# Altium PCB PCB.PcbDoc
Units mm, origin at the board's own origin, x right, y up, seen from the top; angles counter-clockwise.
Board outline 100 x 90 mm, 2 copper layers (Top Layer, Bottom Layer); 31 components, 42 nets, 141 pads, 8 vias.
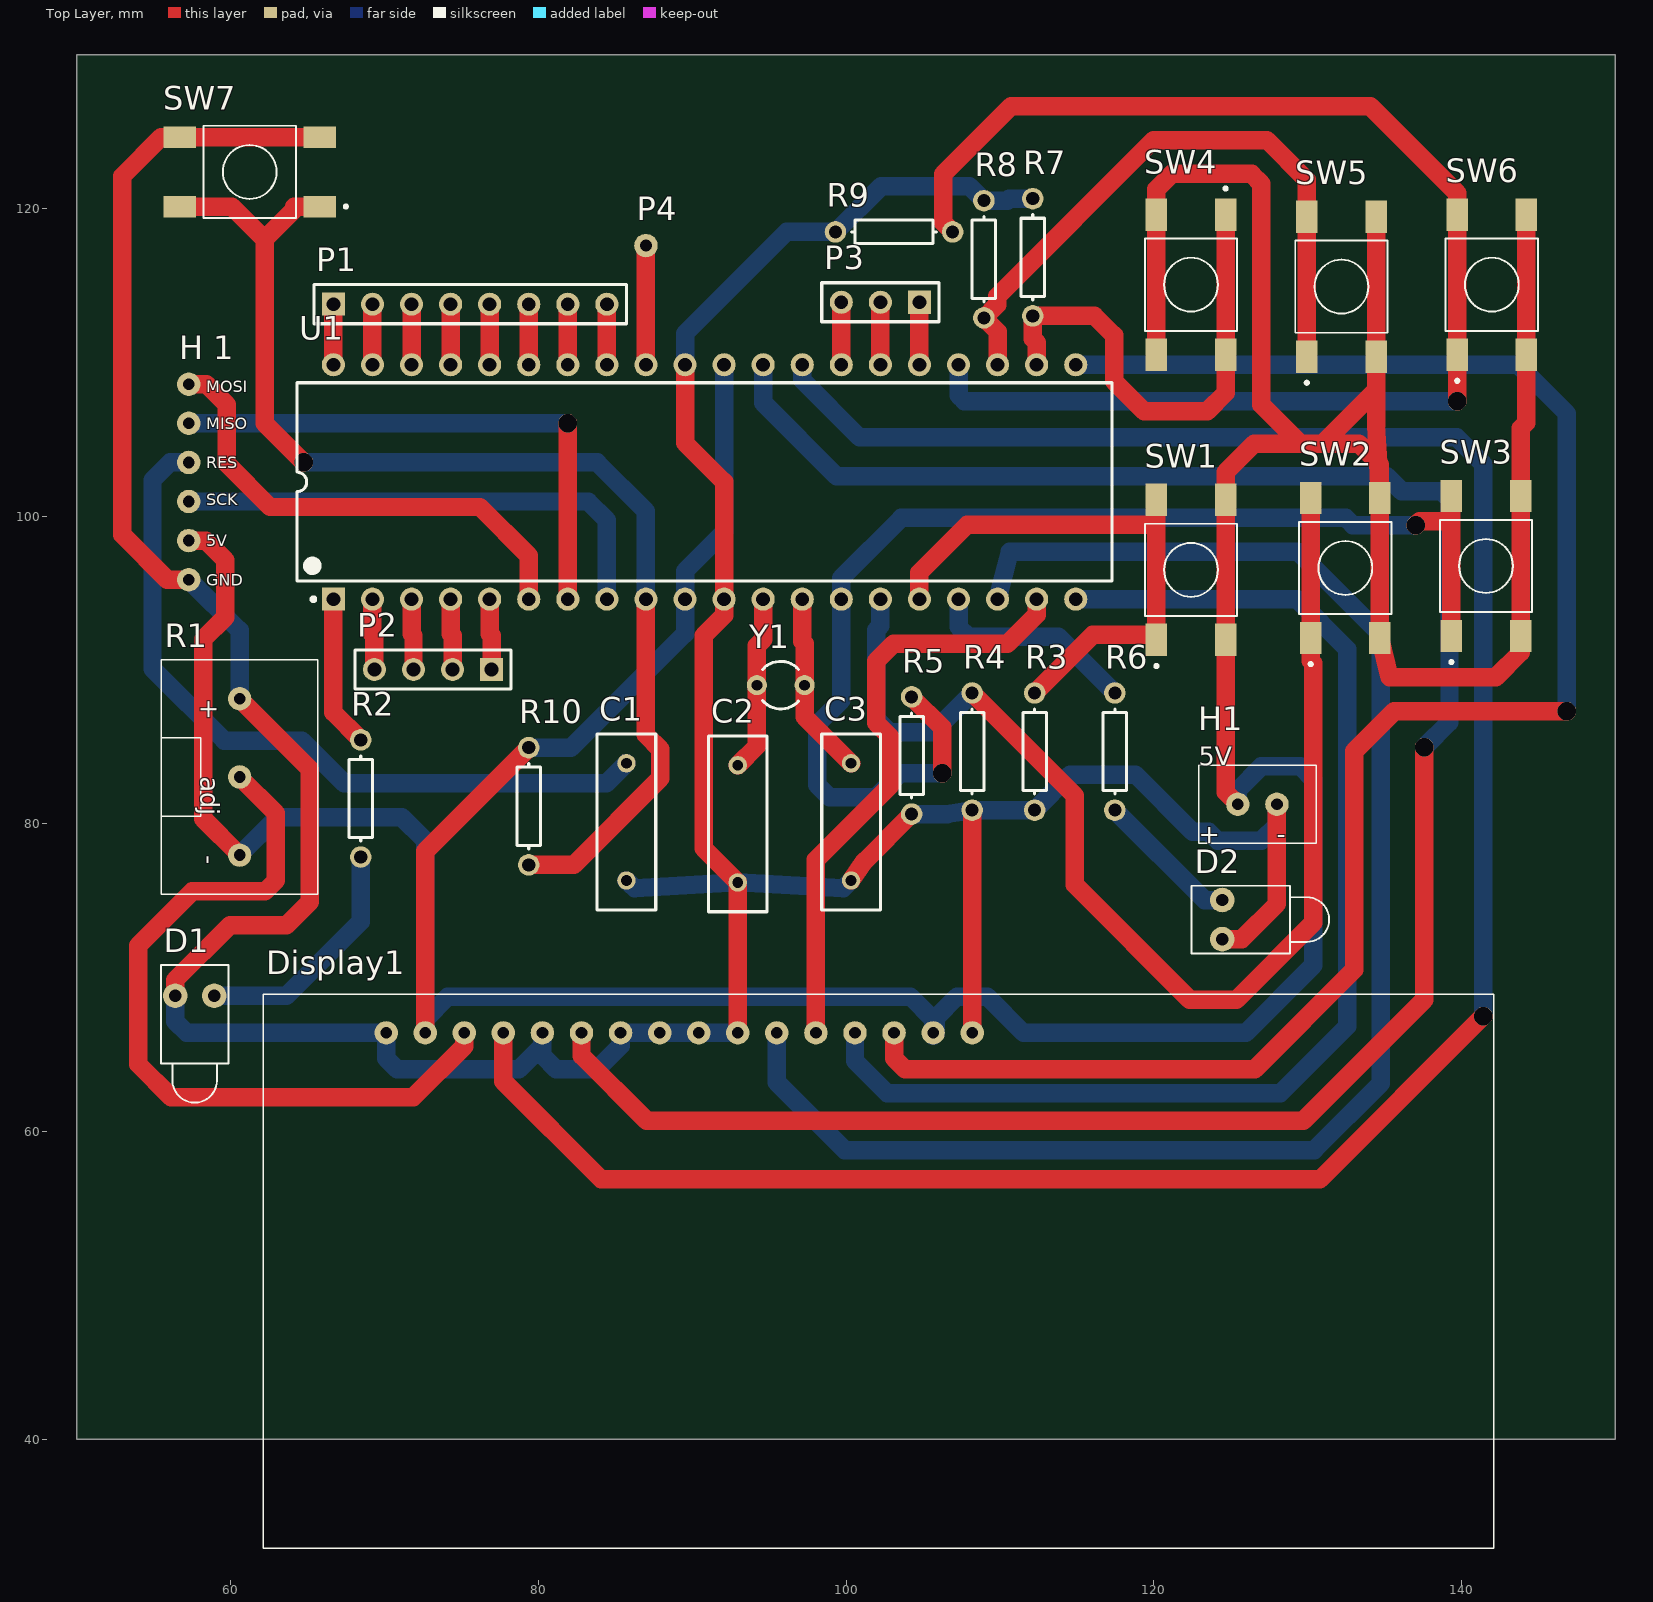
[diagram p0: Top Layer view]
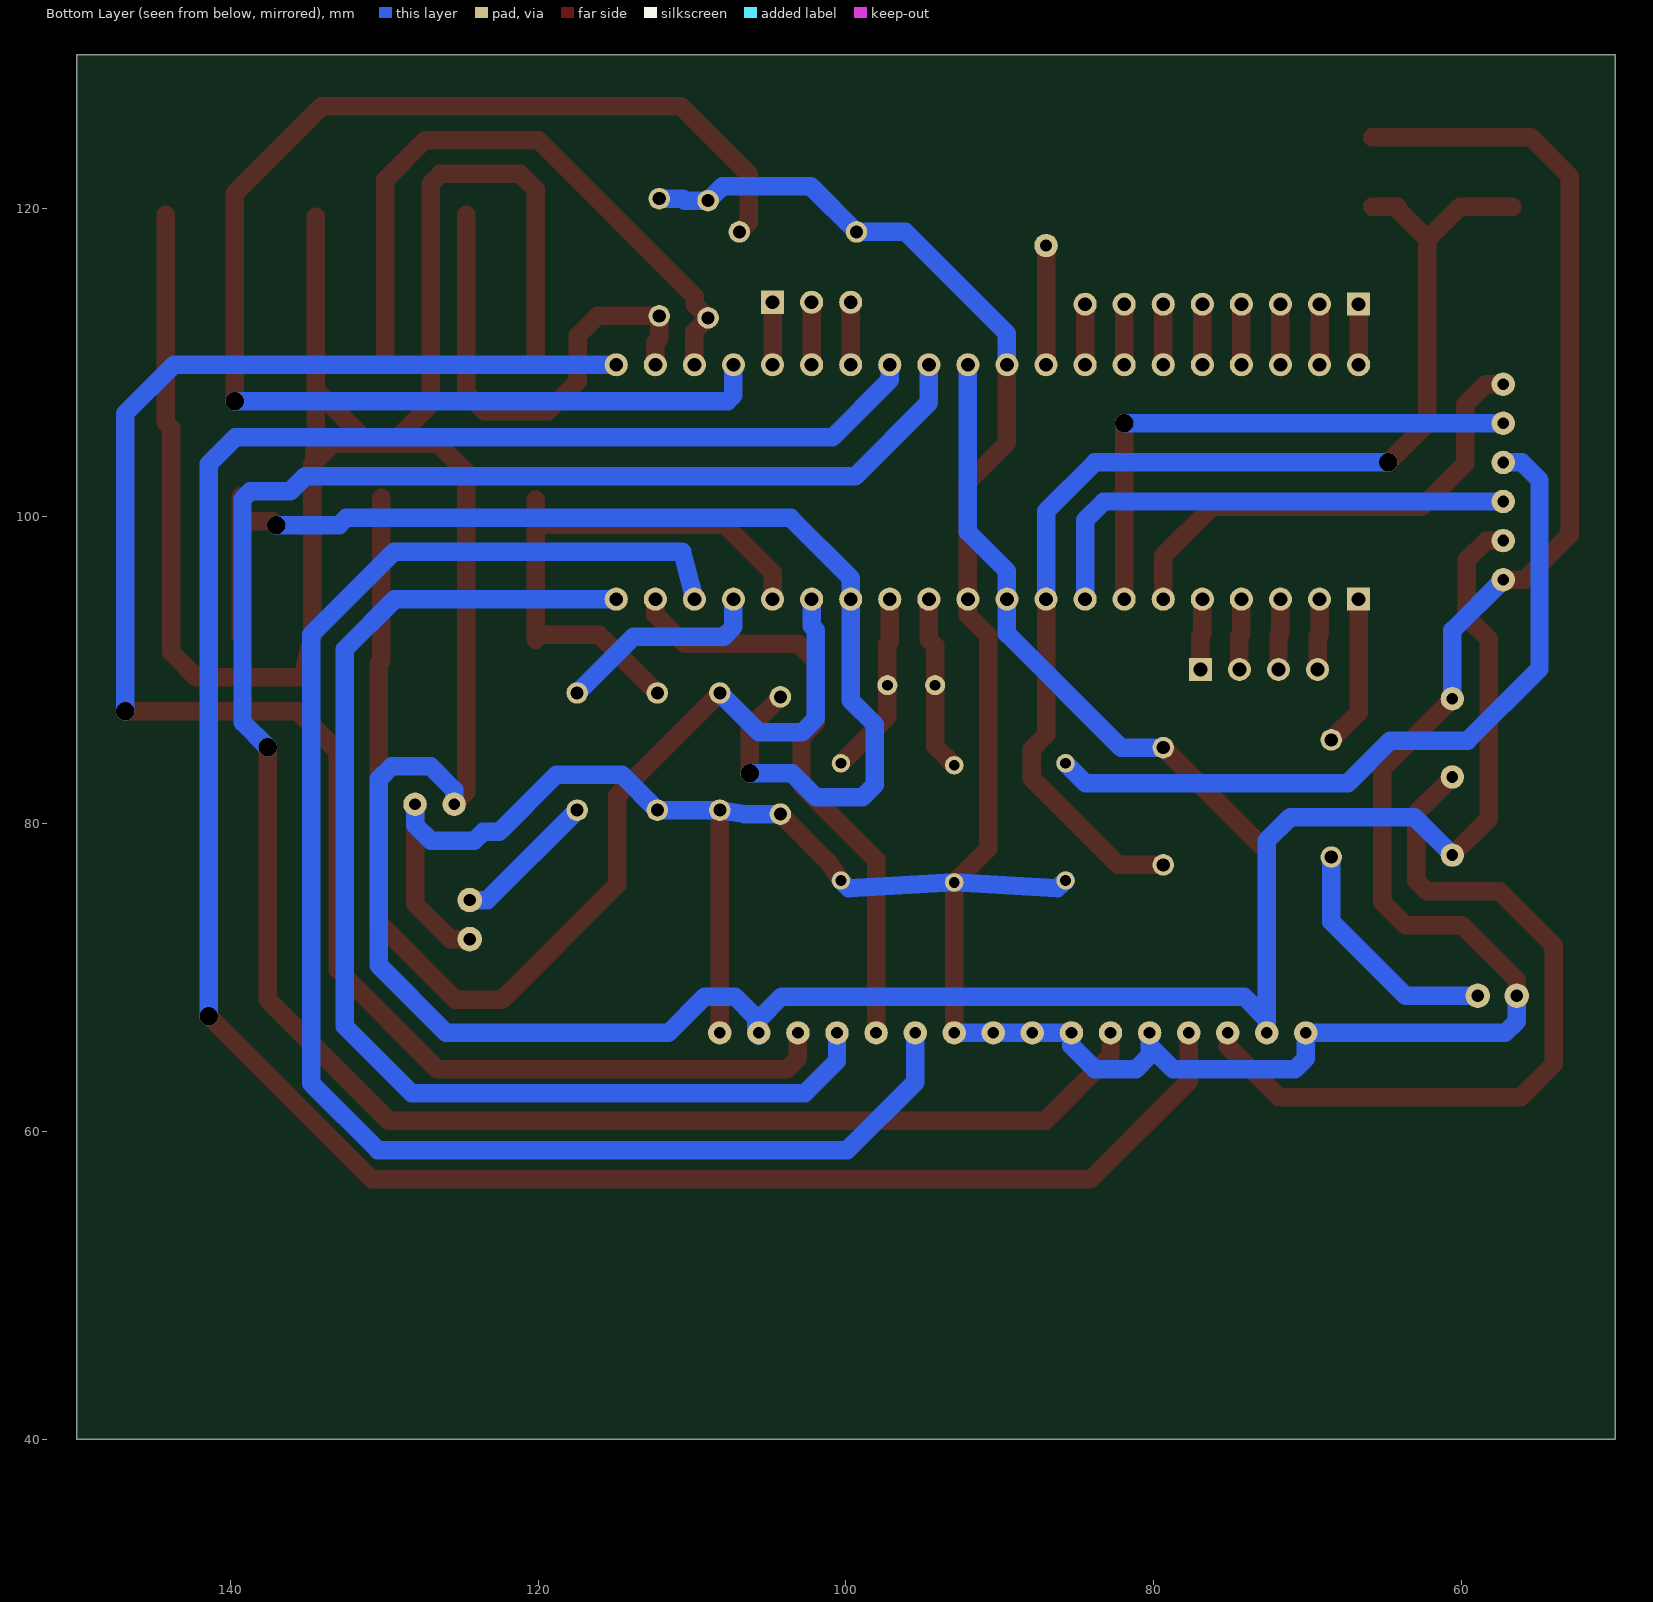
[diagram p1: Bottom Layer view, seen from below]

## Layer stack, top to bottom
Top Solder: solder mask 0.0102, Solder Resist, Dk 3.5
Top Layer: signal copper 0.0356
Dielectric 1: dielectric 0.32, FR-4, Dk 4.8
Bottom Layer: signal copper 0.0356
Bottom Solder: solder mask 0.0102, Solder Resist, Dk 3.5

## Board outline
50,130 150,130 150,40 50,40

## Design rules (kind name [scope] priority, off if disabled: settings)
Clearance [All] p1: gap=0.6 ignorepadtopadclearanceinfootprint=FALSE
PolygonConnect [All] p1: connectstyle=Relief reliefconductorwidth=0.254 reliefentries=4 polygonreliefangle="90 Angle" airgapwidth=0.254
RoutingVias [All] p1: holewidth=1.2 width=1.2 viastyle="Through Hole" minholewidth=1.2 minwidth=1.2 maxholewidth=1.2 maxwidth=1.2
SilkToSilkClearance [All] p1 off: silktosilkclearance=0.254
SilkToSolderMaskClearance [IsPad] p1 off: minsilkscreentomaskgap=0.254 clearancetoexposedcopper=TRUE
SolderMaskExpansion [All] p1: expansion=0.102
Width [All] p1: maxlimit=1.5 minlimit=1 preferedwidth=1.2
28 further rules are at their usual default settings.

## Components (designator, comment, footprint, x,y, rotation, side; value= is the part's Value field where it differs from the comment)
C1 "Cap" RAD-0.3 85.725,80.137 r270 top value=10uF
C2 "Cap" RAD-0.3 92.964,80.01 r90 top value=22pF
C3 "Cap" RAD-0.3 100.33,80.137 r90 top value=22pF
D1 "LED1" LED-1 57.658,68.834 r270 top
D2 "LED1" LED-1 124.46,73.787 r0 top
Display1 "LCD 16 x 2" LCD16x2 62.104,68.921 r0 top
H1 "Prikljucak 5V" "H 5V" 125.476,81.28 r0 top
"H 1" "Programator" USBASP 57.277,108.585 r270 top
P1 "Header 8" HDR1X8 66.675,113.792 r0 top
P2 "Header 4" HDR1X4 76.962,90.043 r180 top
P3 "Header 3" HDR1X3 104.775,113.919 r180 top
P4 "Header 1" "Header 1" 86.995,117.602 r0 top
R1 "10k" ADJ_RES 60.579,83.058 r270 top
R2 "Res1" AXIAL-0.3 68.453,81.661 r90 top value=470
R3 "Res1" AXIAL-0.3 112.268,84.709 r90 top value=10K
R4 "Res1" AXIAL-0.3 108.204,84.709 r90 top value=10K
R5 "Res1" AXIAL-0.3 104.267,84.455 r90 top value=10K
R6 "Res1" AXIAL-0.3 117.475,84.709 r270 top value=470
R7 "Res1" AXIAL-0.3 112.141,116.84 r270 top value=10K
R8 "Res1" AXIAL-0.3 108.966,116.713 r270 top value=10K
R9 "Res1" AXIAL-0.3 103.124,118.491 r0 top value=10K
R10 "Res1" AXIAL-0.3 79.375,81.153 r270 top value=10K
SW1 "2-1437565-8" *SW_SMD_2-1437565-8_4_4.50_6.00_6.00_5.00 122.428,96.52 r90 top
SW2 "2-1437565-8" *SW_SMD_2-1437565-8_4_4.50_6.00_6.00_5.00 132.461,96.647 r90 top
SW3 "2-1437565-8" *SW_SMD_2-1437565-8_4_4.50_6.00_6.00_5.00 141.605,96.774 r90 top
SW4 "2-1437565-8" *SW_SMD_2-1437565-8_4_4.50_6.00_6.00_5.00 122.428,115.062 r270 top
SW5 "2-1437565-8" *SW_SMD_2-1437565-8_4_4.50_6.00_6.00_5.00 132.207,114.935 r90 top
SW6 "2-1437565-8" *SW_SMD_2-1437565-8_4_4.50_6.00_6.00_5.00 141.986,115.062 r90 top
SW7 "2-1437565-8" *SW_SMD_2-1437565-8_4_4.50_6.00_6.00_5.00 61.236,122.392 r180 top
U1 "ATmega32-16PI" 40P6 90.805,102.235 r90 top
Y1 "XTAL" R38 95.758,89.027 r270 top

## Footprints (in the part's own frame and the unit in brackets; to place one, negate y for a bottom-side part, rotate by r counter-clockwise, add the part's x,y. Pads: shape width x height; smd on the part's side, far side on the other; paste and mask are expansions set on the pad)
40P6 [mm] "DIP, 40-Leads, Row Spacing 15.24mm, Pitch 2.54mm, Body 52.2x13.95mm"
  rect 1.5x1.5 hole 0.9: 1(-7.62,24.13)
  round 1.5 hole 0.9: 2(-7.62,21.59) 3(-7.62,19.05) 4(-7.62,16.51) 5(-7.62,13.97) 6(-7.62,11.43) 7(-7.62,8.89) 8(-7.62,6.35) 9(-7.62,3.81) 10(-7.62,1.27) 11(-7.62,-1.27) 12(-7.62,-3.81) 13(-7.62,-6.35) 14(-7.62,-8.89) 15(-7.62,-11.43) 16(-7.62,-13.97) 17(-7.62,-16.51) 18(-7.62,-19.05) 19(-7.62,-21.59) 20(-7.62,-24.13) 21(7.62,-24.13) 22(7.62,-21.59) 23(7.62,-19.05) 24(7.62,-16.51) 25(7.62,-13.97) 26(7.62,-11.43) 27(7.62,-8.89) 28(7.62,-6.35) 29(7.62,-3.81) 30(7.62,-1.27) 31(7.62,1.27) 32(7.62,3.81) 33(7.62,6.35) 34(7.62,8.89) 35(7.62,11.43) 36(7.62,13.97) 37(7.62,16.51) 38(7.62,19.05) 39(7.62,21.59) 40(7.62,24.13)
  silkscreen extent -7.74,-26.5 6.45,26.5, body extent -7.05,-26.47 7.05,26.47, height 4.83
*SW_SMD_2-1437565-8_4_4.50_6.00_6.00_5.00 [mm]
  rect 2.1x1.4 smd: 1(-4.55,2.25) 2(4.55,2.25) 3(-4.55,-2.25) 4(4.55,-2.25)
  silkscreen extent -6.35,-3 3,3
ADJ_RES [mil] "Promenljivi Otpornik"
  round 60 hole 30: 1(-200,0) 2(200,0) 3(0,0)
  silkscreen extent -300,-200 300,200
AXIAL-0.3 [mm] "Axial Device, Thru-Hole; 2 Leads; 0.3 in Pin Spacing"
  round 1.4 hole 0.85: 1(-3.81,0) 2(3.81,0)
  silkscreen extent -2.77,-0.76 2.77,0.76
"H 5V" [mil] "prikljucak 5 volti"
  round 60 hole 30: 1(0,0) 2(100,0)
  silkscreen extent -100,-100 200,100
HDR1X3 [mm] "Connector; Header; 3 Position"
  rect 1.5x1.5 hole 0.9: 1(0,0)
  round 1.5 hole 0.9: 2(2.54,0) 3(5.08,0)
  silkscreen extent -1.27,-1.27 6.35,1.27
HDR1X4 [mm] "Connector; Header; 4 Position"
  rect 1.5x1.5 hole 0.9: 1(0,0)
  round 1.5 hole 0.9: 2(2.54,0) 3(5.08,0) 4(7.62,0)
  silkscreen extent -1.27,-1.27 8.89,1.27
HDR1X8 [mm] "Connector; Header; 8 Position"
  rect 1.5x1.5 hole 0.9: 1(0,0)
  round 1.5 hole 0.9: 2(2.54,0) 3(5.08,0) 4(7.62,0) 5(10.16,0) 6(12.7,0) 7(15.24,0) 8(17.78,0)
  silkscreen extent -1.27,-1.27 19.05,1.27
"Header 1" [mil]
  round 60 hole 30: 1(0,0)
LCD16x2 [mil] "LCD16x2"
  round 60 hole 30: 1(314.96,-98.43) 2(414.96,-98.43) 3(514.96,-98.43) 4(614.96,-98.43) 5(714.96,-98.43) 6(814.96,-98.43) 7(914.96,-98.43) 8(1014.96,-98.43) 9(1114.96,-98.43) 10(1214.96,-98.43) 11(1314.96,-98.43) 12(1414.96,-98.43) 13(1514.96,-98.43) 14(1614.96,-98.43) 15(1714.96,-98.43) 16(1814.96,-98.43)
  silkscreen extent 0,-1417 3150,0
LED-1 [mm] "LED; 2 Leads"
  round 1.6 hole 0.8: 1(0,1.27) 2(0,-1.27)
  silkscreen extent -2,-2.2 6.95,2.2
R38 [mm] "Crystal, Thru-Hole; 2 Leads; Body 3.1 x 8.2 mm (Dia.xH)"
  round 1.3 hole 0.7: 1(0,1.55) 2(0,-1.55)
  silkscreen extent -1.55,-1.19 1.55,1.17
RAD-0.3 [mm] "Radial Cap, Thru-Hole; 2 Leads; 0.3 in Pin Spacing"
  round 1.2 hole 0.7: 1(-3.81,0) 2(3.81,0)
  silkscreen extent -5.71,-1.91 5.71,1.91
USBASP [mil]
  round 60 hole 30: 1(0,0) 2(100,0) 3(200,0) 4(300,0) 5(400,0) 6(500,0)

## Part data
C1 C2 C3: "Capacitor", LatestRevisionDate=17-Jul-2002, LatestRevisionNote="Re-released for DXP Platform.", PackageDescription="Radial Cap, Thru-Hole; 2 Leads; 0.3 in Pin Spacing", PackageReference=RAD-0.3, Published=8-Jun-2000, Publisher="Altium Limited"
D1 D2: "Typical RED GaAs LED", LatestRevisionDate=08-Jul-2005, LatestRevisionNote="Mech Layer 1 removed.", PackageDescription="LED; 2 Leads", PackageReference=LED-1, Published=8-Jun-2000, Publisher="Altium Limited"
Display1: library part "LCD 16 X 2"
H1: library part "Header 5V"
"H 1": library part USBASP
P1: "Header, 8-Pin", LatestRevisionDate=17-Jul-2002, LatestRevisionNote="Re-released for DXP Platform.", Publisher="Altium Limited"
P2: "Header, 4-Pin", LatestRevisionDate=17-Jul-2002, LatestRevisionNote="Re-released for DXP Platform.", Publisher="Altium Limited"
P3: "Header, 3-Pin", LatestRevisionDate=17-Jul-2002, LatestRevisionNote="Re-released for DXP Platform.", Publisher="Altium Limited"
R1: library part ADJ_RES
R2 R3 R4 R5 R6 R7 R8 R9 R10: "Resistor", LatestRevisionDate=17-Jul-2002, LatestRevisionNote="Re-released for DXP Platform.", PackageDescription="Axial Device, Thru-Hole; 2 Leads; 0.3 in Pin Spacing", PackageReference=AXIAL-0.3, Published=8-Jun-2000, Publisher="Altium Limited"
SW1 SW2 SW3 SW4 SW5 SW6 SW7: "Tactile Switch SPST-NO Top Actuated Surface Mount", Contact_Current_Rating="50 mA", Package=None, Availability=Unavailable, Configuration_Pole-Throw="Single Pole - Single Throw", MF="TE Connectivity", MP=2-1437565-8, Price=None, SnapEDA_Link=https://www.snapeda.com/parts/2-1437565-8/TE%20Connectivity%20ALCOSWITCH%20Switches/view-part/455292/?ref=snap, TE_purchase_URL=https://www.te.com/usa-en/product-2-1437565-8.html?te_bu=Cor&te_type=disp&te_campaign=seda_glo_cor-seda-global-disp-prtnr-fy19-seda-model-bom-cta_sma-317_1&elqCampaignId=32493
U1: "8-Bit AVR Microcontroller with 32K Bytes of In-System Programmable Flash Memory", Supplier Part Number 1=ATMEGA32-16PI-ND, Code_JEDEC=MS-011-AC, ComponentLink1Description=Datasheet, ComponentLink1URL=http://www.atmel.com/dyn/resources/prod_documents/doc2503.pdf, ComponentLink2Description="Atmel.com Home", ComponentLink2URL=http://www.atmel.com, DatasheetVersion=2503C-AVR-10/02, PackageDescription="40-lead (0.600\"/15.24mm Wide) Plastic Dual Inline Package (PDIP)", PackageReference=40P6, PackageVersion="revB, Sep-2001", Published=17-Sep-2003, Publisher="Altium Limited", Supplier 1=Digi-Key, Supplier 2=Farnell, Supplier 3=Mouser, Supplier Part Number 2=4376328, Supplier Part Number 3=556-ATMEGA32-16PI
Y1: "Crystal Oscillator", LatestRevisionDate=17-Jul-2002, LatestRevisionNote="Re-released for DXP Platform.", PackageDescription="Crystal, Thru-Hole; 2 Leads; Body 3.1 x 8.2 mm (Dia.xH)", PackageReference=R38, Published=8-Jun-2000, Publisher="Altium Limited"

## Via types
v1: diameter 1.2, hole 1.2, Top Layer to Bottom Layer, 8 vias

## Nets (pads, with @x,y where several pads share a name; then routed paths per layer and width w, separated by ;. In a path a pad name is that pad's centre, name@x,y a point inside that pad or via, vN(x,y) a via of type N, cw(c..) or ccw(c..) an arc to the next point about the centre after c; other vN are vias at no path point)
+5V: "H 1.5" Display1.2 Display1.15 H1.1 R1.2 R10.1 SW1.3 SW1.4 SW2.3 SW2.4 SW3.3 SW3.4 SW4.3 SW4.4 SW5.3 SW5.4 SW6.3 SW6.4 U1.10 U1.30 | length 330.7
  Top Layer w1.2: 57.277,98.425 58.369,98.425 59.639,97.155 59.639,93.447 58.217,92.024 58.217,80.34 R1.2 ; Display1.2 72.644,78.232 R10.1 ; SW4.4 SW4.3 120.178,121.26 121.18,122.262 126.365,122.262 127,121.627 127,107.264 129.54,104.724 ; H1.1 124.678,82.078 SW1.3 SW1.4 124.678,102.87 126.532,104.724 129.54,104.724 ; SW5.4 SW5.3 134.457,108.204 ; SW6.4 SW6.3 144.236,106.096 143.855,105.715 SW3.4 SW3.3 143.855,91.15 142.24,89.535 135.346,89.535 SW2.3 SW2.4 ; 129.54,104.724 130.977,104.724 ; 130.977,104.724 133.35,104.724 134.588,103.486 ; 130.977,104.724 134.457,108.204 ; 134.457,108.204 134.457,105.918 134.588,103.486 ; 134.588,103.486 SW2.4 ; 134.588,103.486 134.711,103.363 SW2.4
  Bottom Layer w1.2: R1.2 63.043,80.442 71.12,80.442 72.644,78.918 72.644,67.31 ; Display1.2 72.644,67.31 ; R10.1 82.118,84.963 89.535,92.38 U1.10 89.535,96.444 92.075,98.984 U1.30 ; H1.1 125.476,82.22 127,83.744 129.54,83.744 130.378,82.906 130.378,70.815 125.984,66.421 111.544,66.421 109.182,68.783 107.226,68.783 105.842,67.399 105.842,66.421 105.664,66.243 Display1.15 105.664,67.31 104.191,68.783 74.117,68.783 72.644,67.31
GND: "H 1.6" C1.2 C2.1 C3.1 D1.2 D2.2 Display1.1 Display1.5 Display1.7 Display1.8 Display1.9 Display1.10 Display1.16 H1.2 R1.1 R3.1 R4.1 R5.1 R7.1 R8.1 R9.1 SW7.3 SW7.4 U1.11 U1.31 | length 272.8
  Top Layer w1.2: D1.2 56.388,69.85 59.954,73.416 63.627,73.416 65.141,74.93 65.141,83.576 R1.1 ; 57.277,95.885 55.88,95.885 52.959,98.806 52.959,122.123 55.478,124.642 SW7.4 SW7.3 ; U1.31 89.535,104.775 92.075,102.235 U1.11 92.075,93.574 90.754,92.253 90.754,78.41 C2.1 Display1.10 ; C3.1 101.194,77.572 R5.1 ; Display1.16 R4.1 ; D2.2 125.73,72.517 128.016,74.803 H1.2
  Bottom Layer w1.2: D1.2 56.388,67.183 57.15,66.421 Display1.1 70.104,64.77 70.815,64.059 78.74,64.059 80.264,65.583 ; 57.277,95.885 60.579,92.583 R1.1 ; Display1.5 80.264,65.583 ; C1.2 86.274,75.835 C2.1 99.835,75.832 C3.1 ; U1.31 89.535,111.887 96.139,118.491 R9.1 102.286,121.463 108.026,121.463 R8.1 110.49,120.523 110.617,120.65 R7.1 ; Display1.10 Display1.9 Display1.8 Display1.7 85.344,65.583 83.82,64.059 81.153,64.059 80.264,64.948 80.264,65.583 ; R5.1 106.578,80.645 R4.1 R3.1 114.579,83.21 118.821,83.21 122.53,79.502 123.571,79.502 124.155,78.918 127,78.918 128.016,79.934 H1.2
NetC1_1: "H 1.3" C1.1 | length 49.5
  Bottom Layer w1.2: 57.277,103.505 56.058,103.505 54.915,102.362 54.915,90.094 59.588,85.42 64.618,85.42 67.386,82.652 84.43,82.652 C1.1
NetC2_2: C2.2 U1.12 Y1.2 | length 11.5
  Top Layer w1.2: C2.2 94.208,85.064 Y1.2 94.208,91.592 94.615,91.999 U1.12
NetC3_2: C3.2 U1.13 Y1.1 | length 12
  Top Layer w1.2: U1.13 97.155,91.872 97.308,91.719 Y1.1 97.308,86.969 C3.2
NetD1_1: D1.1 R2.1 | length 15.7
  Bottom Layer w1.2: D1.1 63.627,68.834 68.453,73.66 R2.1
NetD2_1: D2.1 R6.2 | length 9.4
  Bottom Layer w1.2: R6.2 123.317,75.057 D2.1
NetDisplay1_3: Display1.3 R1.3 | length 50.5
  Top Layer w1.2: R1.3 62.941,80.696 62.941,76.327 62.23,75.616 57.506,75.616 53.975,72.085 53.975,64.389 56.134,62.23 71.857,62.23 75.184,65.557 Display1.3
NetDisplay1_4: Display1.4 U1.28 | length 157.3
  Top Layer w1.2: Display1.4 77.724,63.271 84.099,56.896 130.813,56.896 v1(141.433,67.516)
  Bottom Layer w1.2: U1.28 97.155,108.864 100.886,105.134 139.7,105.134 141.433,103.4 v1(141.433,67.516)
NetDisplay1_6: Display1.6 U1.29 | length 144.2
  Top Layer w1.2: Display1.6 82.804,64.948 87.046,60.706 129.729,60.706 137.592,68.568 v1(137.592,84.988)
  Bottom Layer w1.2: U1.29 94.615,107.387 99.39,102.612 135.15,102.612 136.133,101.63 138.721,101.63 139.233,101.117 139.233,86.63 v1(137.592,84.988)
NetDisplay1_11: Display1.11 U1.18 | length 104.8
  Bottom Layer w1.2: Display1.11 95.504,63.215 99.918,58.801 130.429,58.801 134.778,63.15 134.778,92.298 129.382,97.694 110.648,97.694 U1.18
NetDisplay1_12: Display1.12 U1.19 | length 39.2
  Top Layer w1.2: Display1.12 98.044,77.675 102.892,82.523 102.892,85.645 101.956,86.582 101.956,90.576 103.091,91.712 110.49,91.712 112.395,93.617 U1.19
NetDisplay1_13: Display1.13 U1.20 | length 80
  Bottom Layer w1.2: Display1.13 100.584,64.592 102.692,62.484 128.219,62.484 132.578,66.843 132.578,91.374 129.337,94.615 U1.20
NetDisplay1_14: Display1.14 U1.21 | length 116.2
  Top Layer w1.2: Display1.14 103.124,64.77 103.835,64.059 126.568,64.059 133.045,70.536 133.045,84.734 135.636,87.325 v1(146.863,87.325)
  Bottom Layer w1.2: U1.21 143.688,109.855 146.863,106.68 v1(146.863,87.325)
"NetH 1_1": "H 1.1" U1.6 | length 31.8
  Top Layer w1.2: 57.277,108.585 58.42,108.585 59.741,107.264 59.741,103.429 62.56,100.609 76.2,100.609 79.375,97.434 U1.6
"NetH 1_2": "H 1.2" U1.7 | length 36.1
  Top Layer w1.2: U1.7 v1(81.915,106.045)
  Bottom Layer w1.2: 57.277,106.045 v1(81.915,106.045)
"NetH 1_4": "H 1.4" U1.8 | length 32.8
  Bottom Layer w1.2: 57.277,100.965 83.236,100.965 84.455,99.746 U1.8
NetP1_1: P1.1 U1.40 | length 3.9
  Top Layer w1.2: U1.40 P1.1
NetP1_2: P1.2 U1.39 | length 3.9
  Top Layer w1.2: U1.39 P1.2
NetP1_3: P1.3 U1.38 | length 3.9
  Top Layer w1.2: U1.38 P1.3
NetP1_4: P1.4 U1.37 | length 3.9
  Top Layer w1.2: U1.37 P1.4
NetP1_5: P1.5 U1.36 | length 3.9
  Top Layer w1.2: U1.36 P1.5
NetP1_6: P1.6 U1.35 | length 3.9
  Top Layer w1.2: U1.35 P1.6
NetP1_7: P1.7 U1.34 | length 3.9
  Top Layer w1.2: U1.34 P1.7
NetP1_8: P1.8 U1.33 | length 3.9
  Top Layer w1.2: U1.33 P1.8
NetP2_1: P2.1 U1.5 | length 4.6
  Top Layer w1.2: U1.5 76.835,92.38 76.962,92.253 P2.1
NetP2_2: P2.2 U1.4 | length 4.6
  Top Layer w1.2: U1.4 74.295,92.38 74.422,92.253 P2.2
NetP2_3: P2.3 U1.3 | length 4.6
  Top Layer w1.2: U1.3 71.755,92.38 71.882,92.253 P2.3
NetP2_4: P2.4 U1.2 | length 4.6
  Top Layer w1.2: U1.2 69.215,92.38 69.342,92.253 P2.4
NetP3_1: P3.1 U1.25 | length 4.1
  Top Layer w1.2: U1.25 P3.1
NetP3_2: P3.2 U1.26 | length 4.1
  Top Layer w1.2: U1.26 P3.2
NetP3_3: P3.3 U1.27 | length 4.1
  Top Layer w1.2: U1.27 P3.3
NetP4_1: P4.1 U1.32 | length 7.7
  Top Layer w1.2: U1.32 P4.1
NetR2_2: R2.2 U1.1 | length 9.9
  Top Layer w1.2: U1.1 66.675,87.249 R2.2
NetR3_2: R3.2 SW1.1 SW1.2 U1.16 | length 37
  Top Layer w1.2: U1.16 104.775,96.342 107.874,99.441 120.178,99.441 ; R3.2 116.053,92.304 SW1.1@120.178,92.304 ; SW1.1 SW1.1@120.178,92.304 ; SW1.2 120.178,99.441 ; SW1.1@120.178,92.304 120.178,99.441
NetR4_2: R4.2 SW2.1 SW2.2 U1.15 | length 79.1
  Top Layer w1.2: R4.2 114.884,81.839 114.884,76.048 122.352,68.58 125.378,68.58 130.378,73.58 130.378,90.449 130.211,90.617 SW2.1 SW2.2
  Bottom Layer w1.2: U1.15 102.235,92.888 101.956,92.608 101.956,86.868 102.87,85.954 105.639,85.954 R4.2
NetR5_2: R5.2 SW3.1 SW3.2 U1.14 | length 79.7
  Top Layer w1.2: R5.2 106.248,86.284 v1(106.248,83.287) ; v1(137.033,99.43) 137.298,99.695 139.355,99.695 ; SW3.1 139.355,99.695 ; SW3.2 139.355,99.695
  Bottom Layer w1.2: v1(106.248,83.287) 103.498,83.287 101.949,81.737 98.933,81.737 98.12,82.55 98.12,86.462 99.695,88.036 U1.14 99.695,95.987 103.606,99.897 132.483,99.897 132.95,99.43 v1(137.033,99.43)
NetR6_1: R6.1 U1.17 | length 13.7
  Bottom Layer w1.2: U1.17 107.315,92.814 107.95,92.179 113.815,92.179 R6.1
NetR7_2: R7.2 SW4.1 SW4.2 U1.22 | length 32.2
  Top Layer w1.2: U1.22 112.395,111.303 112.141,111.557 R7.2 116.154,113.03 117.424,111.76 117.424,108.789 119.38,106.833 123.485,106.833 124.678,108.026 SW4.2 SW4.1
NetR8_2: R8.2 SW5.1 SW5.2 U1.23 | length 42.1
  Top Layer w1.2: U1.23 109.855,112.014 R8.2 109.83,113.767 109.83,114.3 119.992,124.462 127.364,124.462 129.957,121.869 SW5.2 SW5.1
NetR9_2: R9.2 SW6.1 SW6.2 U1.24 | length 89.7
  Top Layer w1.2: R9.2 106.324,119.101 106.324,122.25 110.736,126.662 134.079,126.662 139.736,121.006 SW6.2 SW6.1 v1(139.736,107.494)
  Bottom Layer w1.2: U1.24 107.315,107.874 107.695,107.494 v1(139.736,107.494)
NetR10_2: R10.2 SW7.1 SW7.2 U1.9 | length 78.7
  Top Layer w1.2: SW7.2 60.071,120.142 62.202,118.011 ; v1(64.751,103.505) 62.202,106.055 62.202,118.011 ; SW7.1 64.135,120.142 64.135,119.945 62.202,118.011 ; R10.2 82.296,77.343 87.925,82.972 87.925,84.858 86.995,85.788 U1.9
  Bottom Layer w1.2: v1(64.751,103.505) 83.82,103.505 86.995,100.33 U1.9

## Text inside footprints (layer, text, board x,y; h text height)
H1: Top Overlay "-" at 128.016,78.74 h1.2; Top Overlay "+" at 122.936,78.74 h1.2; Top Overlay "5V" at 122.936,83.82 h1.2
"H 1": Top Overlay "MOSI" at 58.42,108.077 h0.76; Top Overlay "MISO" at 58.42,105.664 h0.76; Top Overlay "RES" at 58.42,103.124 h0.76; Top Overlay "SCK" at 58.42,100.711 h0.76; Top Overlay "5V" at 58.42,98.044 h0.76; Top Overlay "GND" at 58.42,95.504 h0.76
R1: Top Overlay "+" at 58.039,88.138 h1.2 r270; Top Overlay "-" at 58.039,77.978 h1.2 r270; Top Overlay "adj" at 58.039,83.058 h1.2 r270